# Altium PCB GR_Stepper_Driver.PcbDoc
Units mil, origin at the board's own origin, x right, y up, seen from the top; angles counter-clockwise.
Board outline 1850.39 x 1336.02 mil, 2 copper layers (Top Layer, Bottom Layer); 16 components, 18 nets, 56 pads, 5 vias.
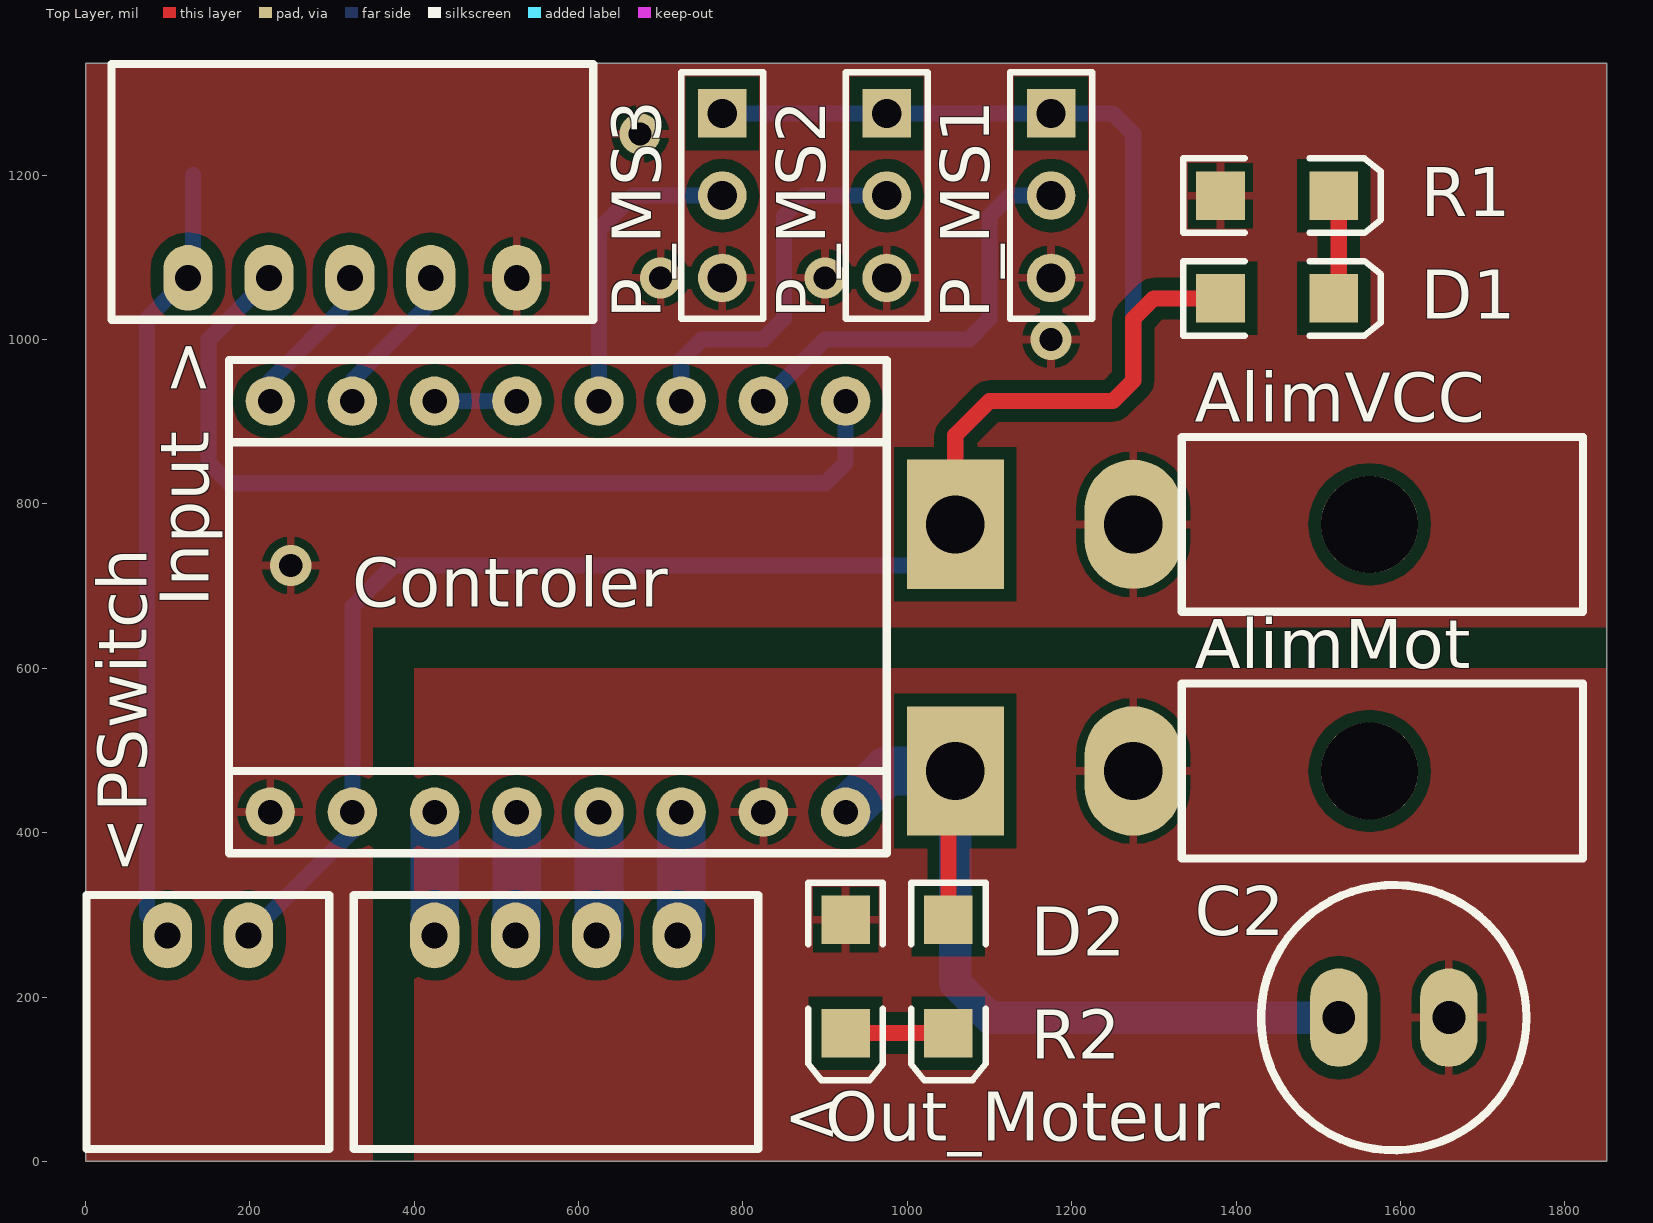
[diagram p0: Top Layer view]
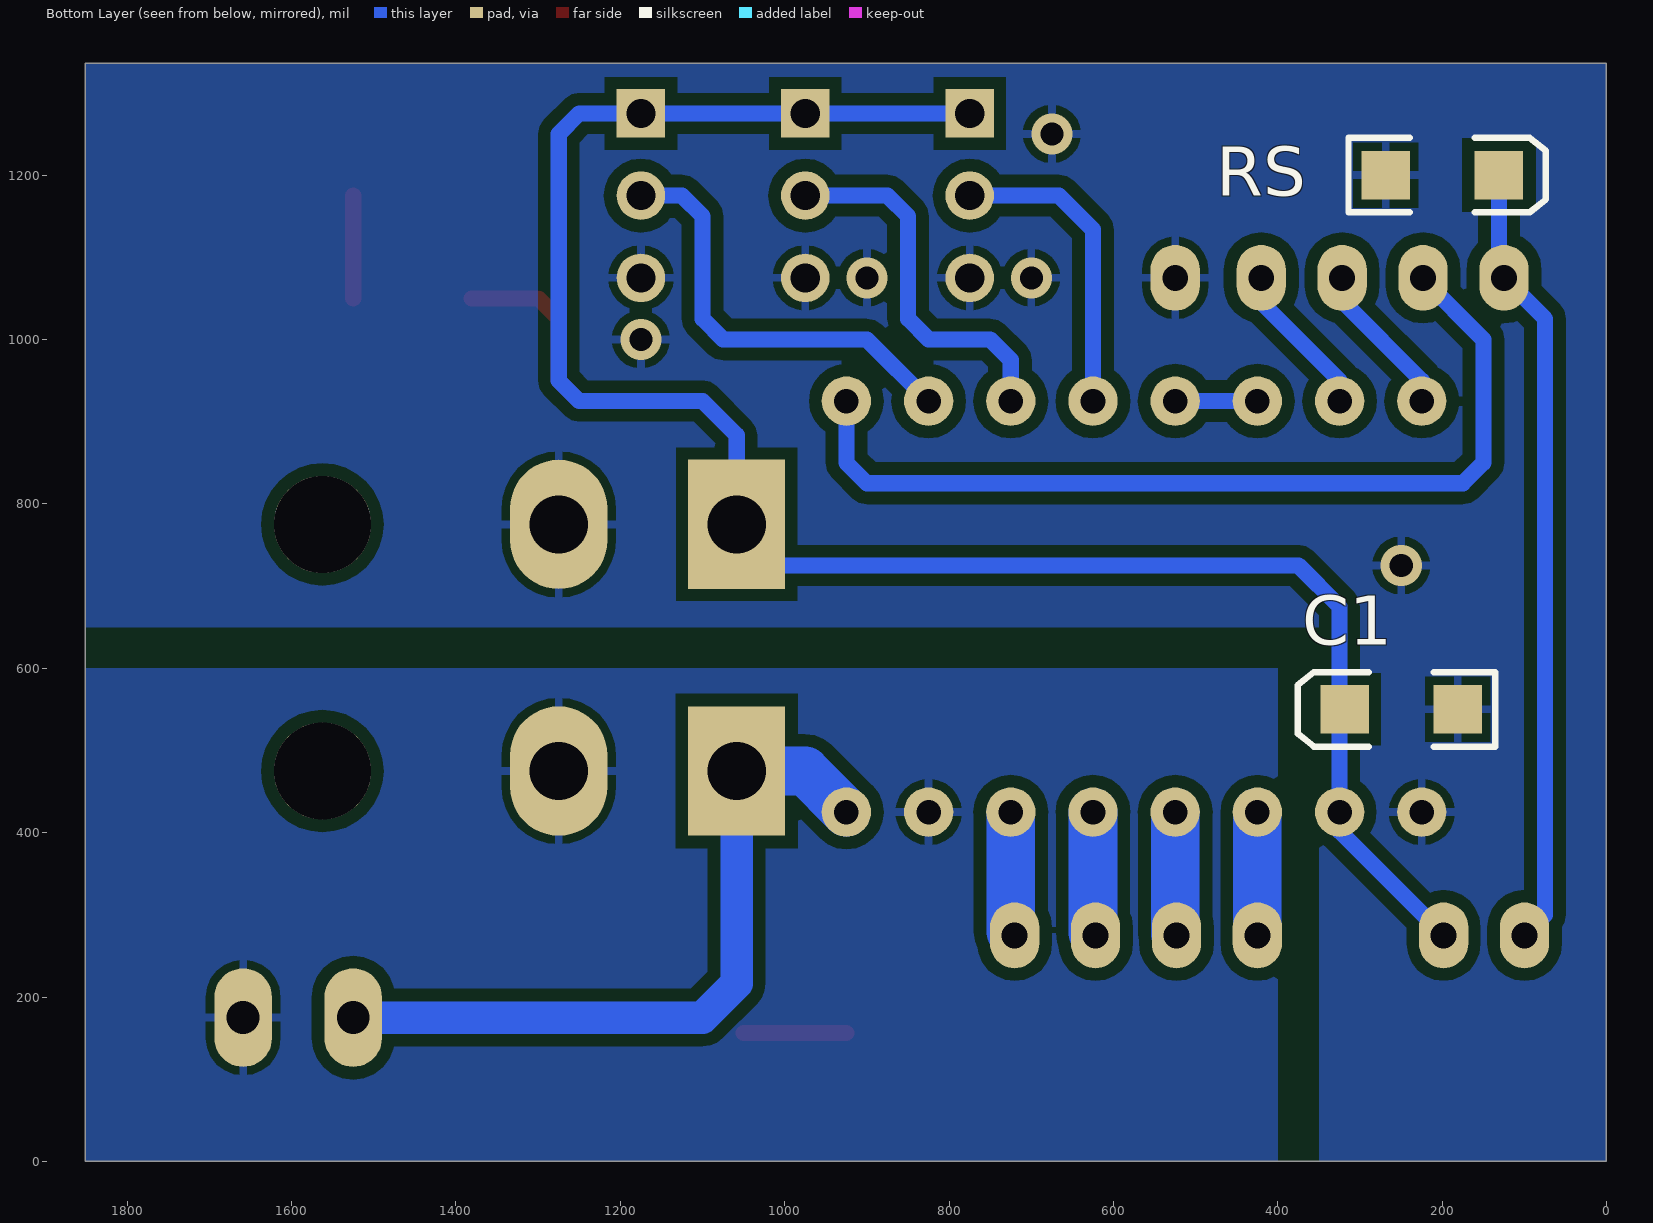
[diagram p1: Bottom Layer view, seen from below]

## Layer stack, top to bottom
Top Solder: solder mask 0.4, Solder Resist, Dk 3.5
Top Layer: signal copper 1.4
Dielectric 1: dielectric 12.6, FR-4, Dk 4.8
Bottom Layer: signal copper 1.4
Bottom Solder: solder mask 0.4, Solder Resist, Dk 3.5

## Board outline
0.59,1336.02 1850.98,1336.02 1850.98,0 0.59,0

## Design rules (kind name [scope] priority, off if disabled: settings)
Clearance [All] p1: gap=10 except(15: Arc-Poly Track-Poly SMDPad-Poly THPad-Poly Via-Poly Fill-Poly Poly-Poly Poly-Region Poly-Text)
PolygonConnect [All] p1: connectstyle=Relief reliefconductorwidth=10 reliefentries=4 polygonreliefangle="90 Angle" airgapwidth=10
RoutingVias [All] p1: holewidth=28 width=50 viastyle="Through Hole" minholewidth=28 minwidth=50 maxholewidth=28 maxwidth=50
SolderMaskExpansion [All] p1: expansion=4
Width [All] p1: maxlimit=59.06 minlimit=10 preferedwidth=19.68
30 further rules are at their usual default settings.

## Components (designator, comment, footprint, x,y, rotation, side; value= is the part's Value field where it differs from the comment)
AlimMot "AlimMot" Molex_MiniFitJr_2x1H 1275,475 r0 top
AlimVCC "AlimVCC" Molex_MiniFitJr_2x1H 1275,775 r0 top
C1 "Cap" 3.2X1.6X1.1 250,550 r0 bottom
C2 "Cap2" Condensateur 1525,175 r0 top
Controler "Steper_Driver" A4988_module 925,925 r270 top locked
D1 "LED0" 3.2X1.6X1.1 1450,1050 r0 top
D2 "LED0" 3.2X1.6X1.1 1050,225 r270 top
Input "Header 5H" "MOLEX SPOX 5X1H" 125,1075 r90 top
Out_Moteur "Header 4 H" "Molex SPOX 4x1H" 425,275 r0 top
P_MS1 "Header 3" HDR1X3 1175,1275 r270 top
P_MS2 "Header 3" HDR1X3 975,1275 r270 top
P_MS3 "Header 3" HDR1X3 775,1275 r270 top
PSwitch "Header 2H" "Molex SPOX 2x1H" 100,275 r0 top
R1 "Res2" 3.2X1.6X1.1 1450,1175 r0 top
R2 "Res2" 3.2X1.6X1.1 925,225 r270 top
RS "Res2" 3.2X1.6X1.1 200,1200 r180 bottom

## Footprints (in the part's own frame and the unit in brackets; to place one, negate y for a bottom-side part, rotate by r counter-clockwise, add the part's x,y. Pads: shape width x height; smd on the part's side, far side on the other; paste and mask are expansions set on the pad)
3.2X1.6X1.1 [mm] "SMT LED; 2 Flat Leads"
  rect 1.5x1.5 smd: 1(-1.75,0) 2(1.75,0)
  silkscreen extent -2.9,-1.15 3.2,1.15
A4988_module [mil] "stepper driver"
  round 60 hole 30: 1(0,0) 2(0,-100) 3(0,-200) 4(0,-300) 5(0,-400) 6(0,-500) 7(0,-600) 8(0,-700) 9(500,-700) 10(500,-600) 11(500,-500) 12(500,-400) 13(500,-300) 14(500,-200) 15(500,-100) 16(500,0)
  silkscreen extent -50,-750 550,50
Condensateur [mil]
  oval 70x120 hole 40: 1(0,0) 2(133.86,0)
  silkscreen extent -94,-161 228,161, body extent -93,-160 227,160, height 500
HDR1X3 [mm] "Connector; Header; 3 Position"
  rect 1.5x1.5 hole 0.9: 1(0,0)
  round 1.5 hole 0.9: 2(2.54,0) 3(5.08,0)
  silkscreen extent -1.27,-1.27 6.35,1.27
"Molex SPOX 2x1H" [mil] "Prise CI, Molex, 3 Contacts, 1 rangée, entraxe 2.5mm, 3A, Coudé, ref 22-03-5035"
  oval 60x80 hole 31.5: 1(0,0) 2(98.43,0)
  silkscreen extent -98,-260 197,49, body extent -98,-262 193,49, height 193
"Molex SPOX 4x1H" [mil] "Prise CI, Molex, 3 Contacts, 1 rangée, entraxe 2.5mm, 3A, Coudé, ref 22-03-5035"
  oval 60x80 hole 31.5: 1(0,0) 2(98.43,0) 3(196.85,0) 4(295.28,0)
  silkscreen extent -98,-260 394,49, body extent -98,-262 390,49, height 193
"MOLEX SPOX 5X1H" [mil]
  oval 80x60 hole 31.5: 1(0,0) 2(0,-98.43) 3(0,-196.85) 4(0,-295.28) 5(0,-400)
  silkscreen extent -51,-493 260,93, body extent -51,-493 260,93, height 215
Molex_MiniFitJr_2x1H [mm] "Connecteur Molex 2"
  rect 3x4 hole 1.8: 1(-5.5,0)
  oval 3x4 hole 1.8: 2(0,0)
  round 3 hole 3 unplated: 3(7.3,0)
  silkscreen extent 1.5,-2.7 13.9,2.7, body extent -6.03,-2.7 13.9,3.1, height 11.01

## Part data
AlimMot AlimVCC: library part Molex_minifit_2
C1 C2: "Capacitor"
Controler: "A4988"
D1 D2: "Typical INFRARED GaAs LED"
Input: "Header, 5-Pin, Right Angle"
Out_Moteur: library part "Header 4", "Header, 4-Pin"
P_MS1 P_MS2 P_MS3: "Header, 3-Pin"
PSwitch: "Header, 2-Pin, Right Angle"
R1 R2 RS: "Resistor"

## Via types
v1: diameter 50, hole 28, Top Layer to Bottom Layer, 5 vias

## Nets (pads, with @x,y where several pads share a name; then routed paths per layer and width w, separated by ;. In a path a pad name is that pad's centre, name@x,y a point inside that pad or via, vN(x,y) a via of type N, cw(c..) or ccw(c..) an arc to the next point about the centre after c; other vN are vias at no path point)
1A: Controler.12 Out_Moteur.2 | length 148.4
  Bottom Layer w59.06: Out_Moteur.2@525,276.57 Controler.12
1B: Controler.11 Out_Moteur.1 | length 150
  Bottom Layer w59.06: Out_Moteur.1 Controler.11
2A: Controler.13 Out_Moteur.3 | length 155.8
  Bottom Layer w10: Out_Moteur.3@621.85,250 Out_Moteur.3@625,253.15 ; Out_Moteur.3 Out_Moteur.3@625,278.15
  Bottom Layer w59.06: Out_Moteur.3@625,278.15 Controler.13
2B: Controler.14 Out_Moteur.4 | length 152
  Bottom Layer w10: Out_Moteur.4@720.28,250 Out_Moteur.4@725,254.72
  Bottom Layer w59.06: Out_Moteur.4@725,279.72 Controler.14
DIR: Controler.8 Input.3 | length 137
  Bottom Layer w19.68: Controler.8@223.43,926.57 Controler.8 ; Controler.8@225,950 Input.3@320.28,1045.28
ENABLE: Controler.1 Input.2 | length 1126.1
  Bottom Layer w19.68: Input.2 223.43,1073.43 150,1000 150,850 175,825 900,825 925,850 Controler.1
GND: AlimVCC.2 C1.1 Controler.9 Input.5 P_MS1.3 P_MS2.3 P_MS3.3 R1.1 RS.1
  other v1: 250,725 1175,1000 700,1075 900,1075 675,1250
GND_A: AlimMot.2 C2.2 Controler.15 R2.1
INTERUPT: Input.1 PSwitch.1 RS.2 | length 958.6
  Bottom Layer w19.68: PSwitch.1 75,300 75,1025 Input.1 131.1,1081.1 RS.2
MS1: Controler.2 P_MS1.2 | length 526.8
  Bottom Layer w19.68: Controler.2 900,1000 1075,1000 1100,1025 1100,1150 1125,1175 P_MS1.2
MS2: Controler.3 P_MS2.2 | length 456.1
  Bottom Layer w19.68: Controler.3 725,975 750,1000 825,1000 850,1025 850,1150 875,1175 P_MS2.2
MS3: Controler.4 P_MS3.2 | length 375.8
  Bottom Layer w19.68: Controler.4 625,1133.66 666.34,1175 P_MS3.2
NetControler_5: Controler.5 Controler.6 | length 106.7
  Bottom Layer w19.68: Controler.6@420.28,929.72 Controler.6 Controler.5
NetD1_2: D1.2 R1.2 | length 125
  Top Layer w19.68: D1.2@1525,1050 R1.2@1525,1175
NetD2_2: D2.2 R2.2 | length 125
  Top Layer w19.68: R2.2 D2.2
STEP: Controler.7 Input.4 | length 189.5
  Bottom Layer w19.68: Controler.7 325,950 420.28,1045.28 Input.4
VCC: AlimVCC.1 C1.2 Controler.10 D1.1 P_MS1.1 P_MS2.1 P_MS3.1 PSwitch.2 | length 2938.4
  Top Layer w19.68: AlimVCC.1 1058.46,883.46 1100,925 1250,925 1275,950 1275,1025 1300,1050 D1.1
  Bottom Layer w19.68: PSwitch.2 325,401.57 Controler.10 ; Controler.10@314.96,425 325,435.04 325,675 375,725 1008.46,725 AlimVCC.1 1058.46,883.46 1100,925 1250,925 1275,950 1275,1250 1250,1275 P_MS1.1 P_MS2.1 P_MS3.1
VMOT: AlimMot.1 C2.1 Controler.16 D2.1 | length 1078.5
  Top Layer w19.68: D2.1 1050,433.07 AlimMot.1@1066.93,450
  Bottom Layer w10: Controler.16@918.9,431.1 Controler.16
  Bottom Layer w19.68: AlimMot.1@1058.46,450 AlimMot.1
  Bottom Layer w39.37: AlimMot.1@1058.46,450 1058.46,216.54 1100,175 C2.1
  Bottom Layer w59.06: Controler.16 975,475 1033.46,475 AlimMot.1@1058.46,450
pads on no net: AlimMot.3 AlimVCC.3

## Polygon pours and split planes (outlines as drawn)
GND_A on Bottom Layer "Bottom GND_A" (solid, remove dead copper, pour order 0): 1850.39,600 400,600 400,0 1850.39,0
GND on Bottom Layer "Bottom GND" (solid, remove dead copper, pour order 6): 1850,650 350,650 350,0 0,0 0,1336.02 1850,1336.02
GND_A on Top Layer "Top GND_A" (solid, remove dead copper, pour order 2): 400,600 400,0 1850,0 1850,600
GND on Top Layer "Top GND" (solid, remove dead copper, pour order 4): 1850,650 350,650 350,0 0,0 0,1336.02 1850,1336.02

## Silkscreen, mask and mechanical layers (free items; w line width, h text height)
Top Overlay:
  text "<" at 100,1000 h60 r270
  text "<" at 75,350 h60 r90
  text "<" at 850,25 h60
Mechanical 2:
  lines w10: 0,0 1850.39,0 1850.39,1338.58 0,1338.58 0,0